# Altium PCB DST800_NMEA2k-CAN_Indicator.PcbDoc
Units mm, origin at the board's own origin, x right, y up, seen from the top; angles counter-clockwise.
Board outline 45 x 56 mm, 4 copper layers (Top Layer, Int1 (GND), Int2 (PWR), Bottom Layer), stack 1.369 mm thick; 41 components, 39 nets, 192 pads, 74 vias.
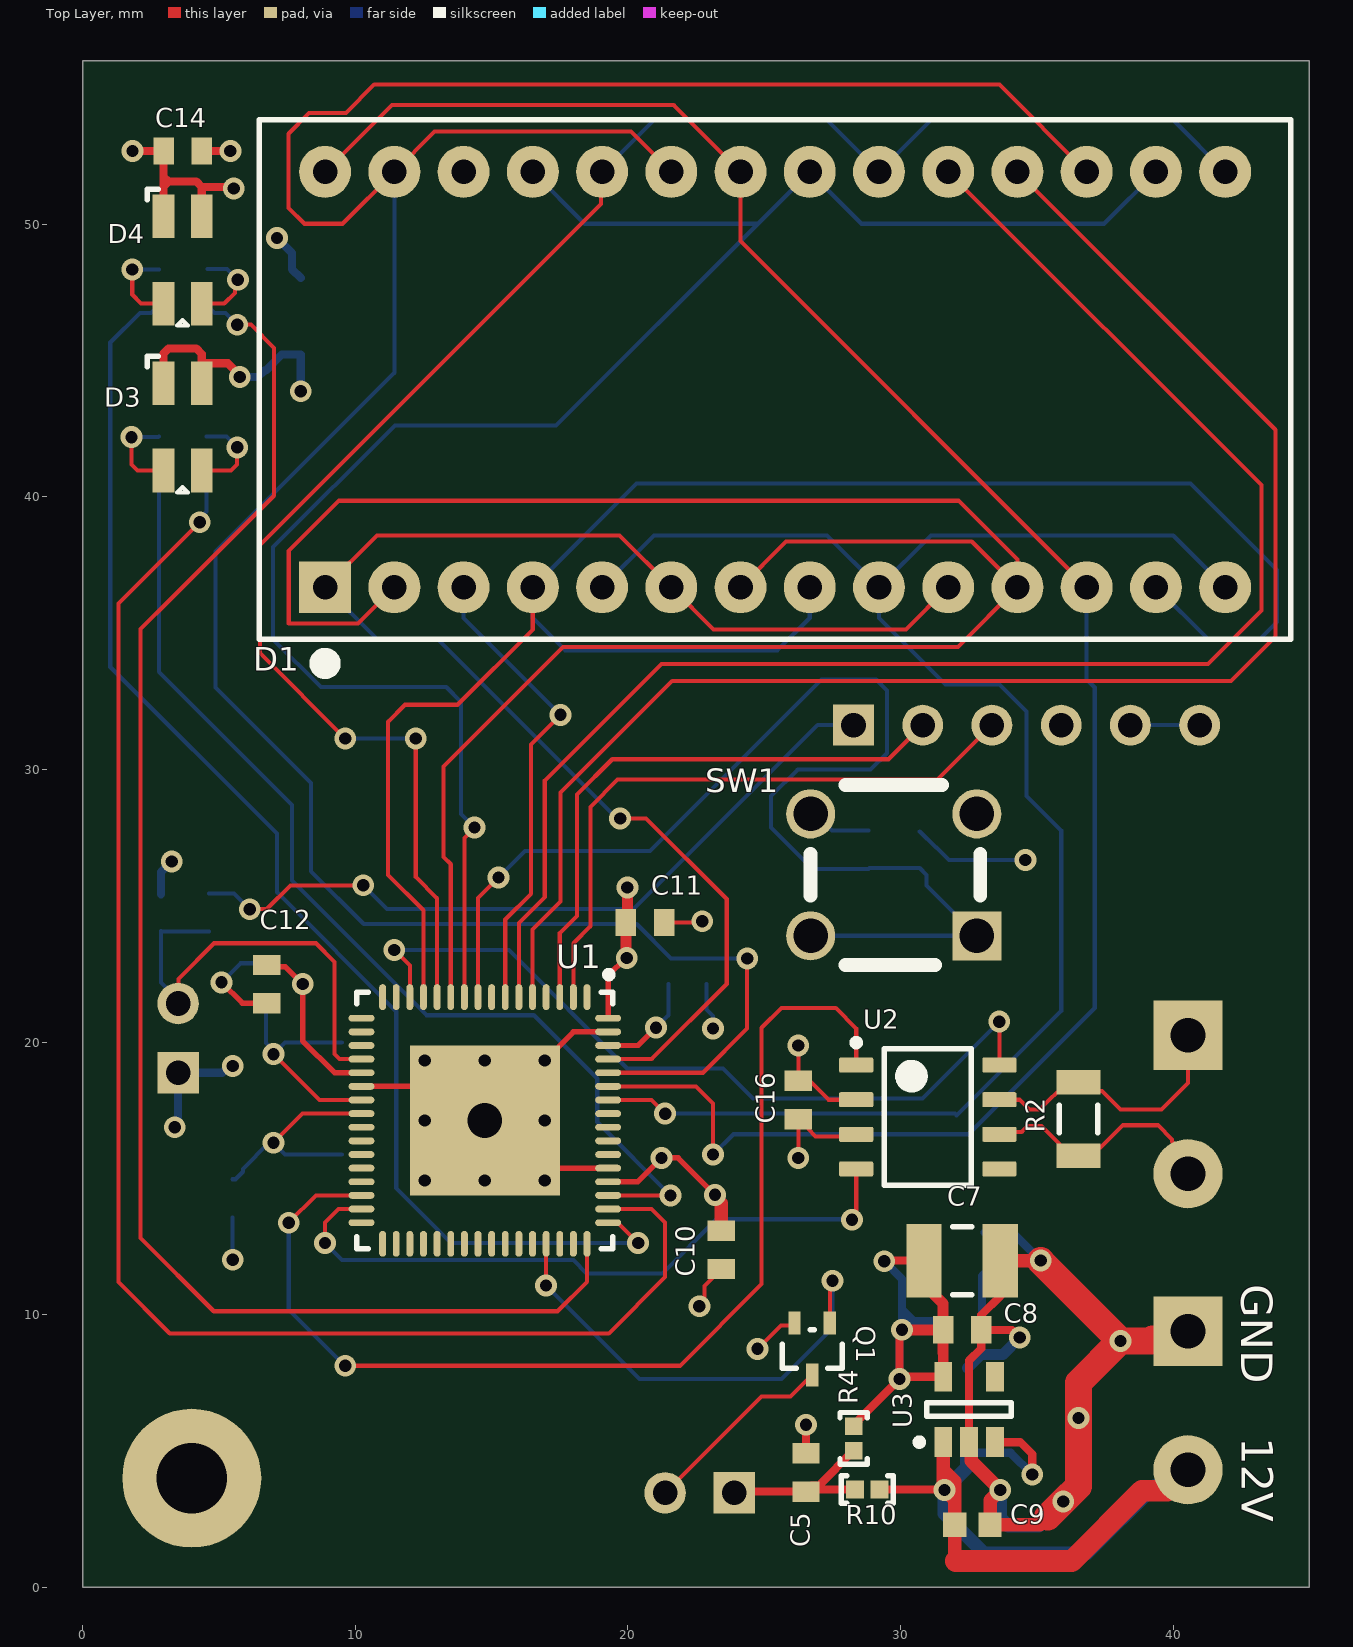
[diagram p0: Top Layer view]
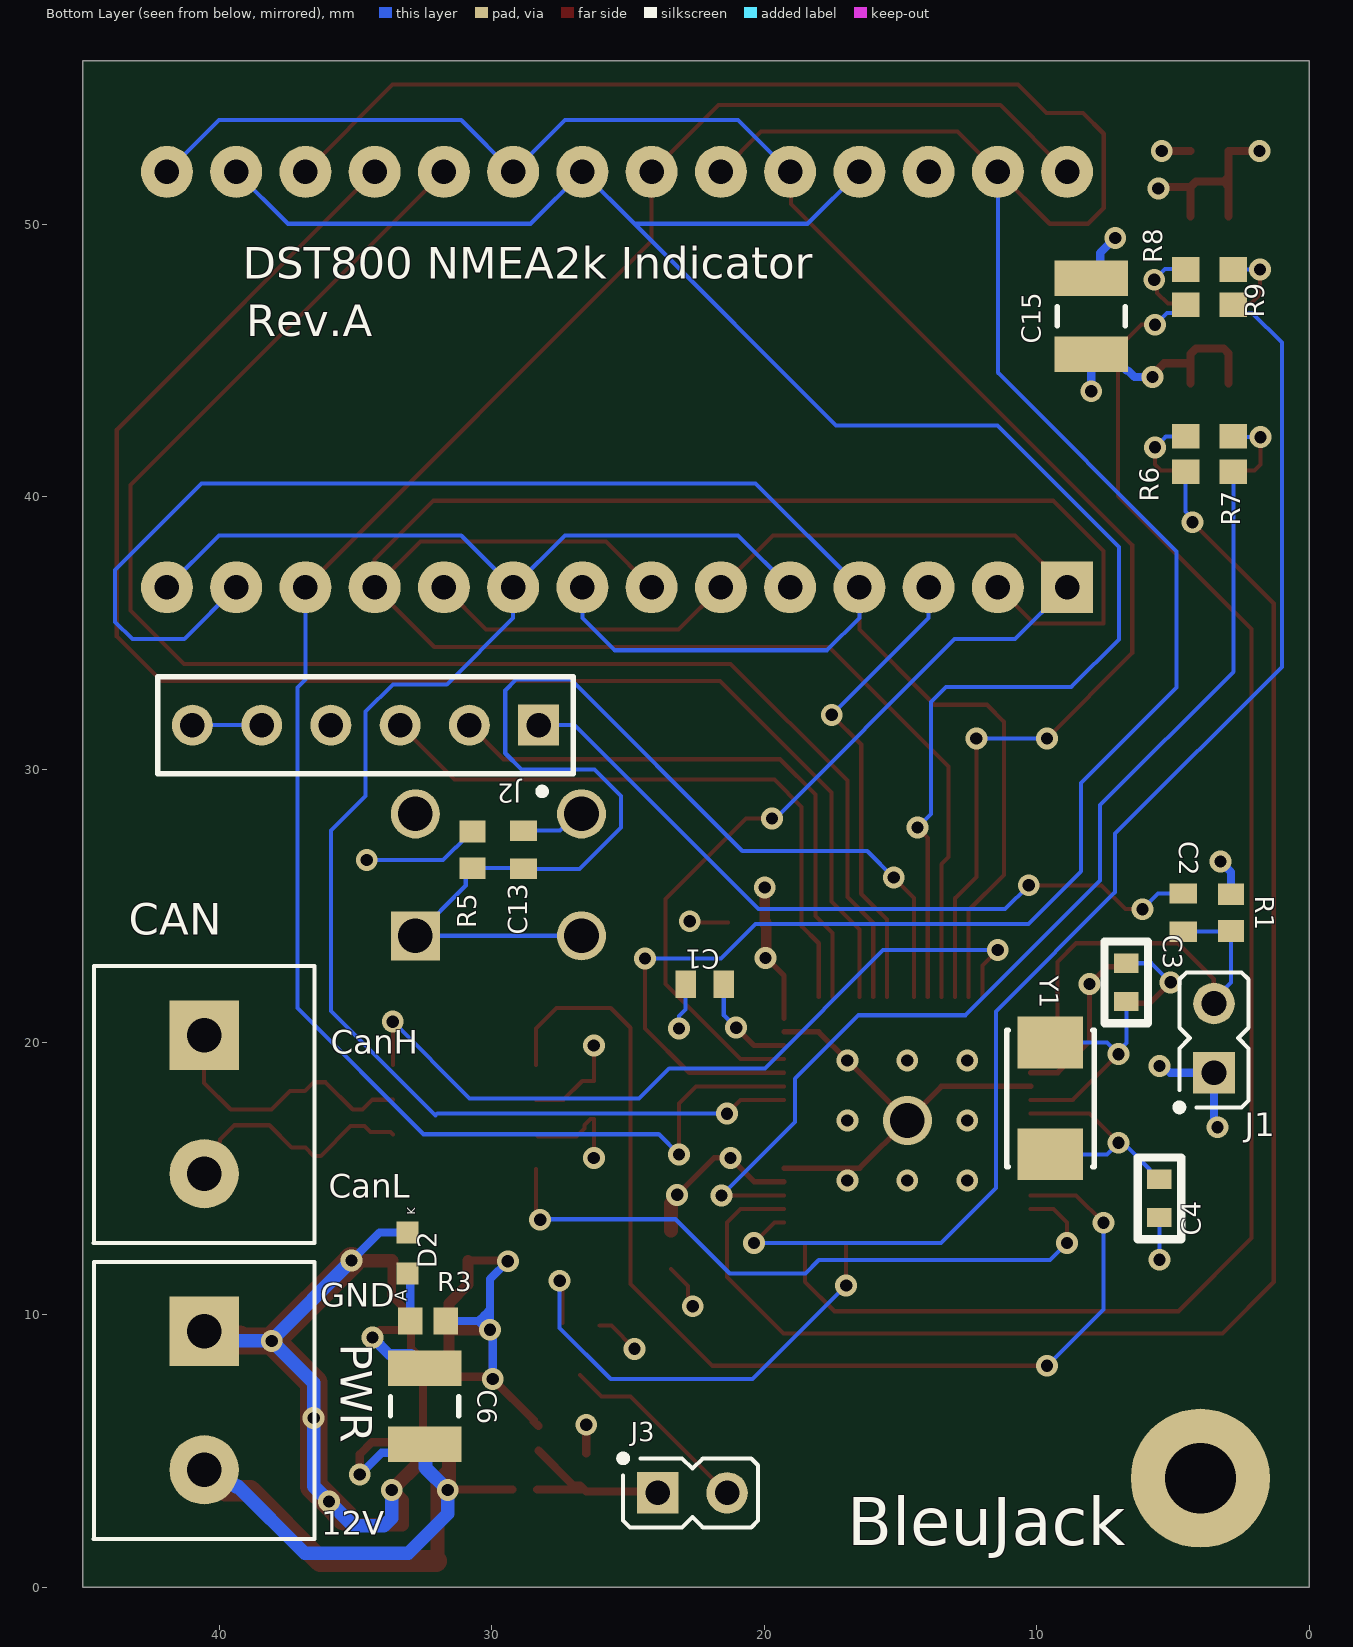
[diagram p1: Bottom Layer view, seen from below]
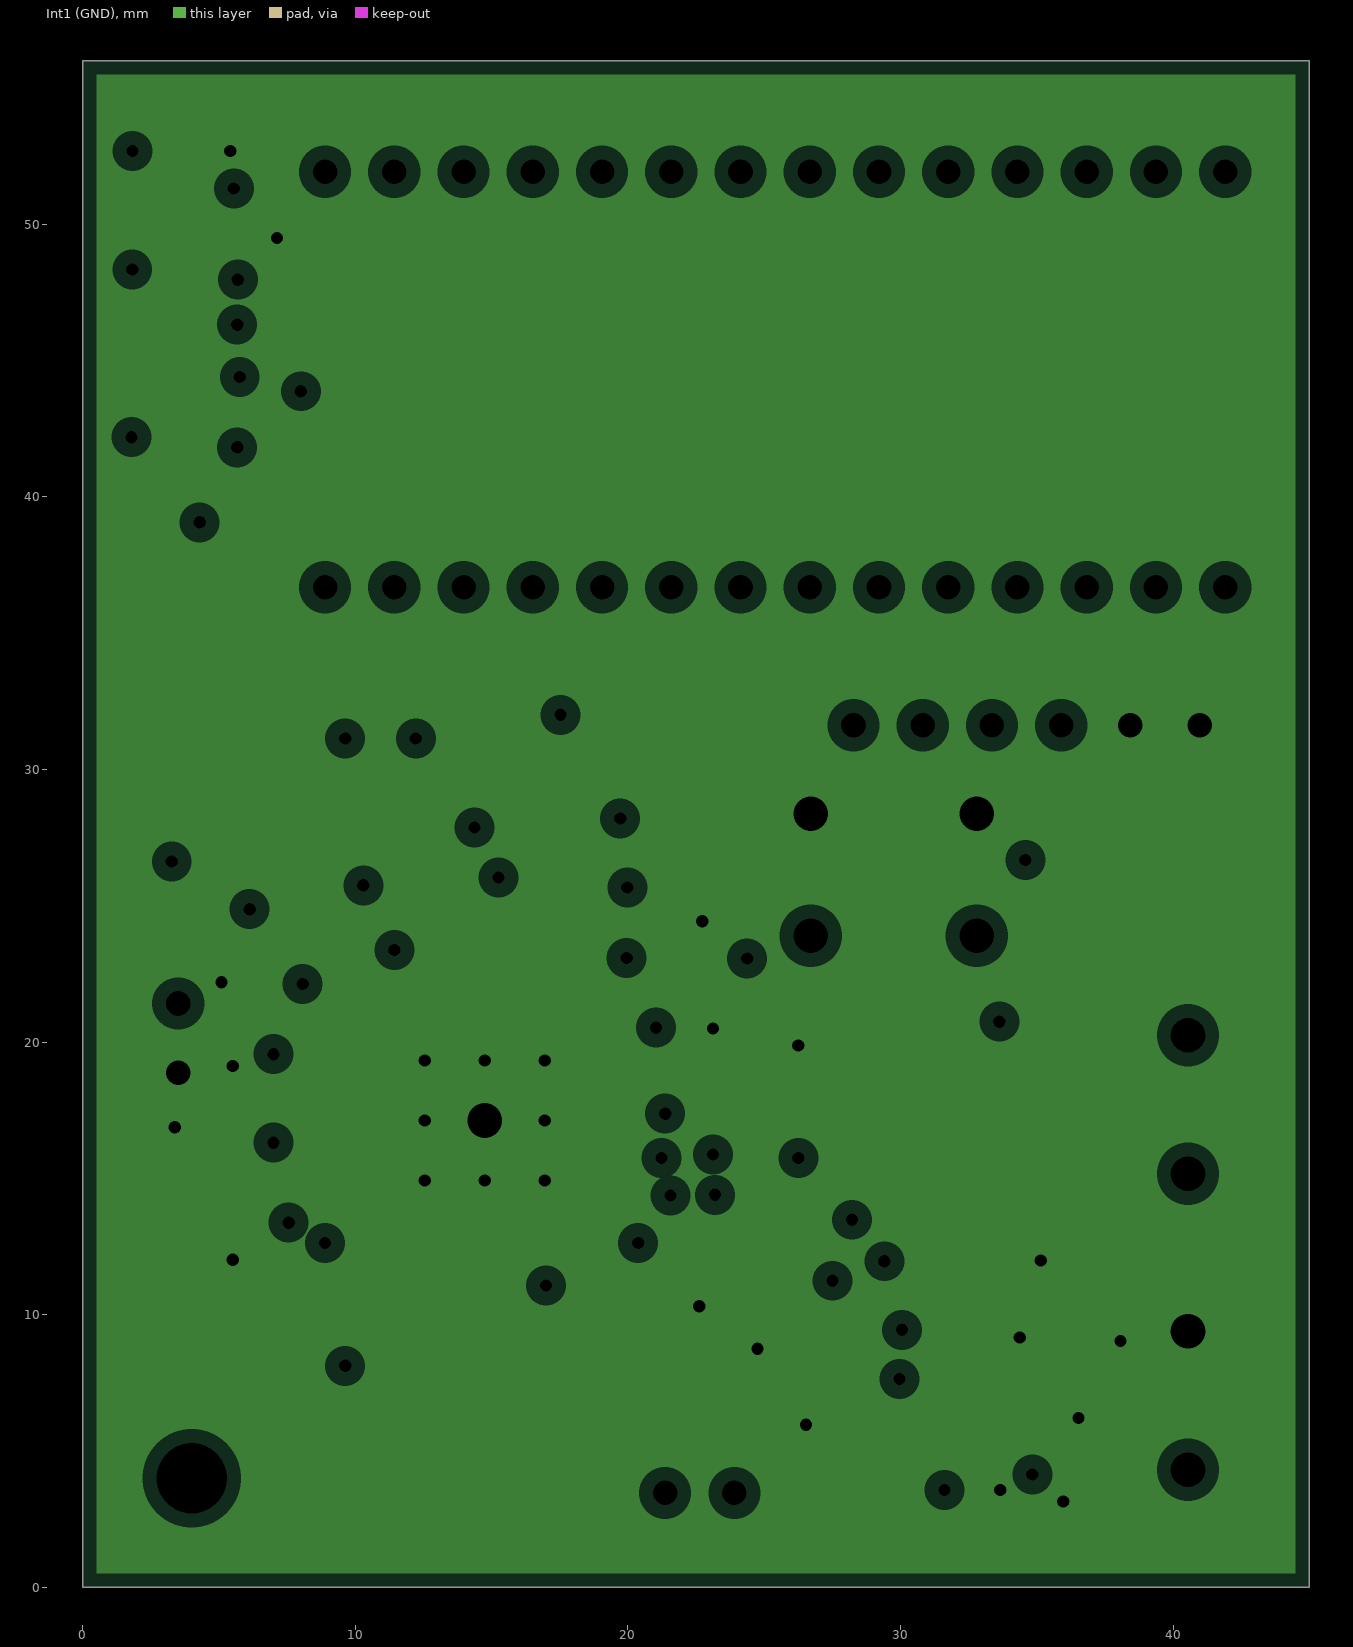
[diagram p2: Int1 (GND), clearances drawn from the general rule]
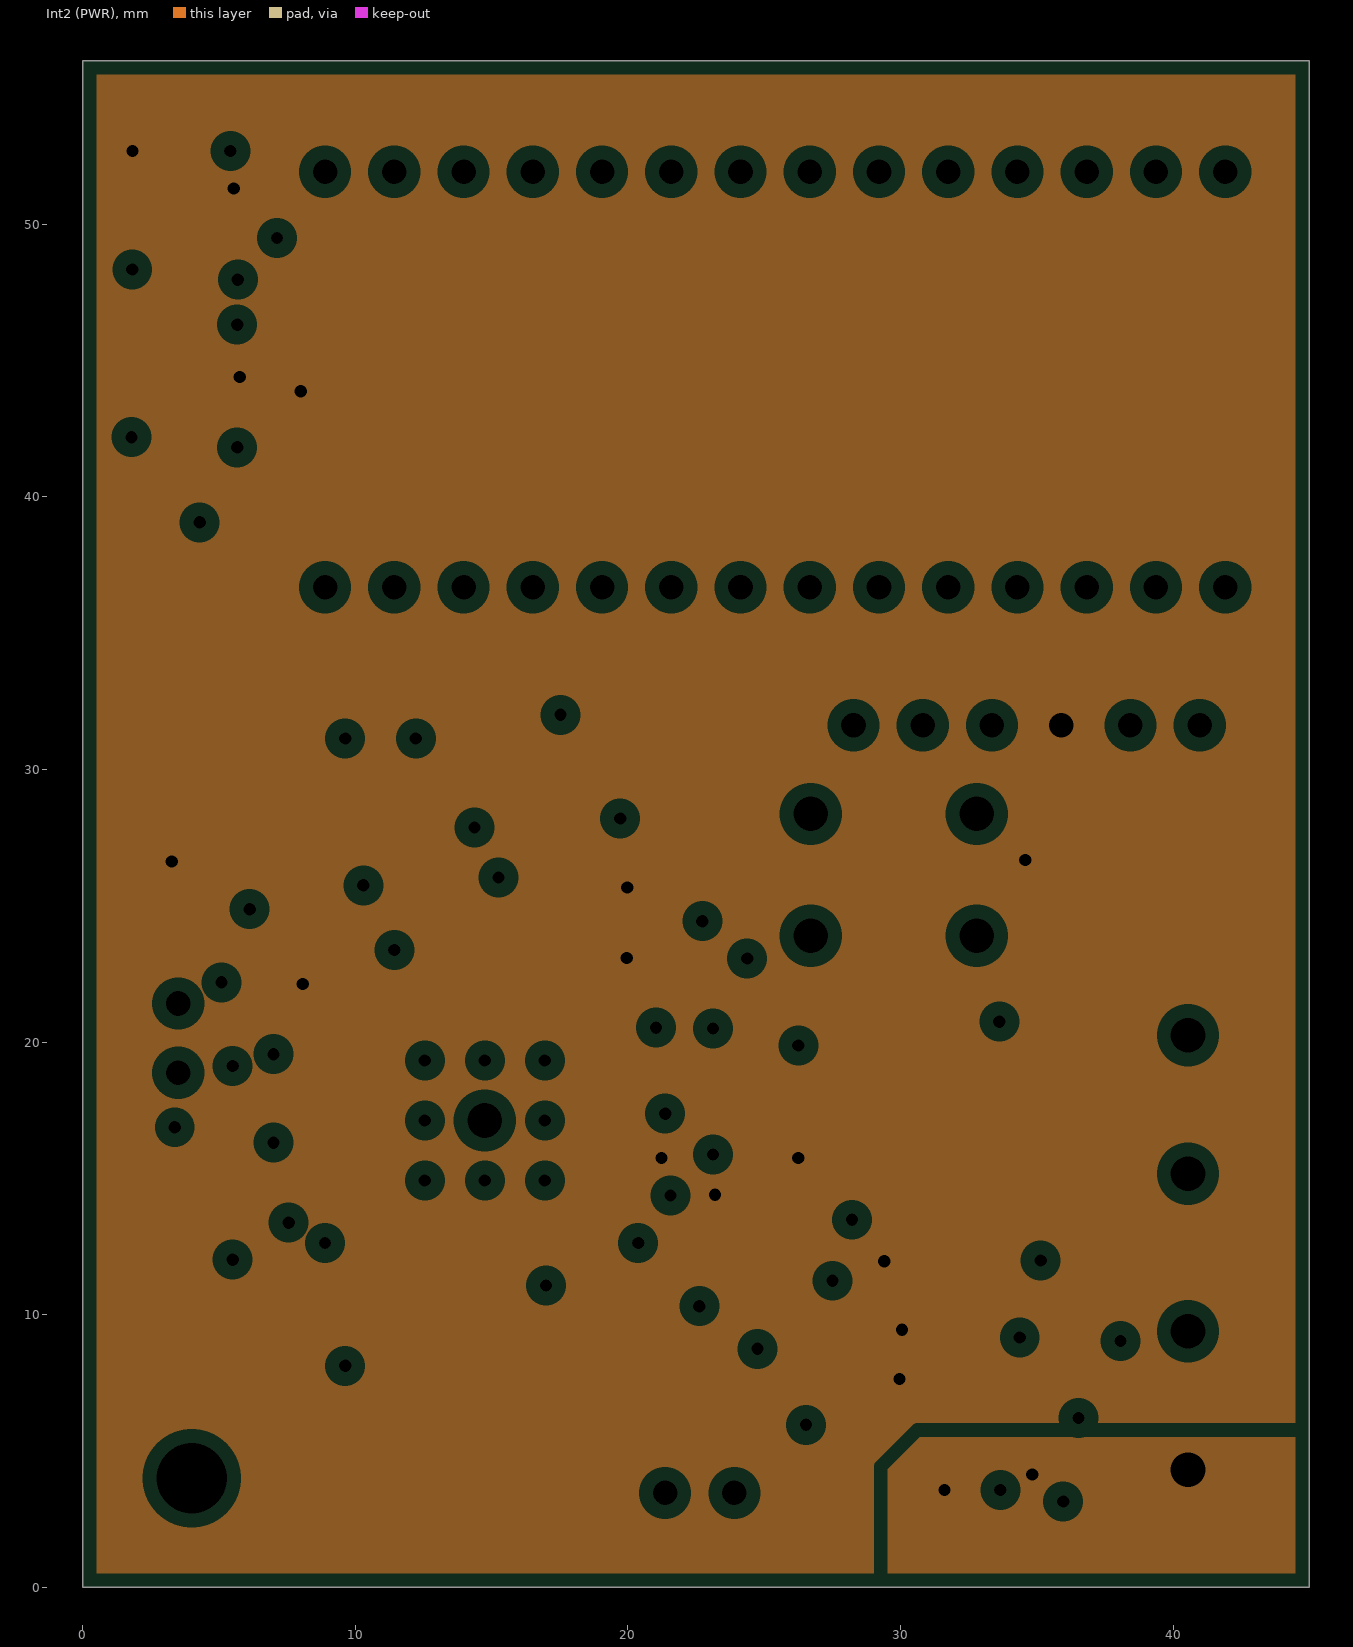
[diagram p3: Int2 (PWR), clearances drawn from the general rule]

## Layer stack, top to bottom
Top Solder: solder mask 0.0254, SM-001, Dk 4
Top Layer: signal copper 0.035
Dielectric 1: prepreg 0.1295, PP-017, Dk 4.3
Dielectric 2: prepreg 0.1295, PP-017, Dk 4.3
Int1 (GND): plane copper 0.035, net GND
Dielectric 3: core 0.7112, Core-039, Dk 4.8
Int2 (PWR): plane copper 0.035, net VCC
Dielectric 4: prepreg 0.1295, PP-017, Dk 4.3
Dielectric 5: prepreg 0.1295, PP-017, Dk 4.3
Bottom Layer: signal copper 0.035
Bottom Solder: solder mask 0.0254, SM-001, Dk 4

## Board outline
0,0 45,0 45,56 0,56

## Design rules (kind name [scope] priority, off if disabled: settings)
Clearance [All] p1: gap=0.203 ignorepadtopadclearanceinfootprint=FALSE
ComponentClearance [All] p1: gap=0 collisioncheckmode=3 verticalgap=0 showdistances=FALSE
DiffPairsRouting DiffPairsRouting_1 [All] p2: maxlimit=0.254 minlimit=0.254 mostfreqgap=0.254 toplayer_minwidth=0.381 toplayer_maxwidth=0.381 toplayer_prefwidth=0.381 bottomlayer_minwidth=0.381 bottomlayer_maxwidth=0.381 bottomlayer_prefwidth=0.381 maxuncoupledlength=12.7
FanoutControl Fanout_LCC [IsLCC] p1: bgadir=Out bgaviamode=Centered fanoutstyle=Auto fanoutdirection=Alternating viagrid=0.025 // Fanout_LCC (Default Rule)
FanoutControl Fanout_BGA [IsBGA] p2: bgadir=Out bgaviamode=Centered fanoutstyle=Auto fanoutdirection=Alternating viagrid=0.025 // Fanout_BGA (Default Rule)
FanoutControl Fanout_Default [All] p4: bgadir=Out bgaviamode=Centered fanoutstyle=Auto fanoutdirection=Alternating viagrid=0.025 // Fanout_Default (Default Rule)
FanoutControl Fanout_Small [(CompPinCount < 5)] p5: bgadir=Out bgaviamode=Centered fanoutstyle=Auto fanoutdirection=OutThenIn viagrid=0.025 // Fanout_Small (Default Rule)
FanoutControl Fanout_BGA_1 [IsBGA] p6: bgadir=Out bgaviamode=Centered fanoutstyle=Auto fanoutdirection=Alternating viagrid=0.025 // Fanout_BGA (Default Rule)
FanoutControl Fanout_LCC_1 [IsLCC] p7: bgadir=Out bgaviamode=Centered fanoutstyle=Auto fanoutdirection=Alternating viagrid=0.025 // Fanout_LCC (Default Rule)
FanoutControl Fanout_SOIC_1 [IsSOIC] p8: bgadir=Out bgaviamode=Centered fanoutstyle=Auto fanoutdirection=Alternating viagrid=0.025 // Fanout_SOIC (Default Rule)
FanoutControl Fanout_Small_1 [(CompPinCount < 5)] p9: bgadir=Out bgaviamode=Centered fanoutstyle=Auto fanoutdirection=OutThenIn viagrid=0.025 // Fanout_Small (Default Rule)
FanoutControl Fanout_Default_1 [All] p10: bgadir=Out bgaviamode=Centered fanoutstyle=Auto fanoutdirection=Alternating viagrid=0.025 // Fanout_Default (Default Rule)
Height Height_1 [All] p2: minheight=0 maxheight=25.4 prefheight=12.7
HoleSize [All] p1: absolutevalues=TRUE maxlimit=5 minlimit=0.45 maxpercent=80.000 minpercent=20.000
MinimumSolderMaskSliver [All] p1: minsoldermaskwidth=0
PasteMaskExpansion PasteMaskExpansion_1 [All] p2: expansion=0
PlaneClearance [All] p1: clearance=0.508
PlaneConnect [All] p1: pad.planeconnectstyle=Relief pad.reliefexpansion=0.5 pad.reliefentries=4 pad.reliefconductorwidth=0.3 pad.reliefairgap=0.25 via.planeconnectstyle=Direct via.reliefexpansion=0.508 via.reliefentries=4 via.reliefconductorwidth=0.254 via.reliefairgap=0.254
PolygonConnect [All] p1: connectstyle=Relief reliefconductorwidth=0.254 reliefentries=4 polygonreliefangle="90 Angle" airgapwidth=0.254
RoomDefinition DST800_NMEA2k-CAN_Indicator [InComponentClass('DST800_NMEA2k-CAN_Indicator')] p1: confinementstyle=ConfineIn formatcopy=TRUE lockcomponents=FALSE outline 0,0 45.085,0 45.085,55.753 0,55.753
RoutingCorners RoutingCorners_1 [All] p2: cornerstyle=45-Degree minsetback=2.54 maxsetback=2.54
RoutingLayers RoutingLayers_1 [All] p2: top layer_v5=TRUE bottom layer_v5=TRUE
RoutingPriority RoutingPriority_1 [All] p2: routingpriority=0
RoutingTopology RoutingTopology_1 [All] p2: topology=Shortest
RoutingVias [All] p1: holewidth=0.711 width=1.27 viastyle="Through Hole" minholewidth=0.711 minwidth=1.27 maxholewidth=0.711 maxwidth=1.27
RoutingVias RoutingVias_1 [All] p2: holewidth=0.711 width=1.27 viastyle="Through Hole" minholewidth=0.711 minwidth=1.27 maxholewidth=0.711 maxwidth=1.27
SilkToBoardRegionClearance SilkToBoardRegionClearance_1 [All] p2:
SilkToSilkClearance [All] p1: silktosilkclearance=0
SilkToSolderMaskClearance [IsPad] p1: minsilkscreentomaskgap=0 clearancetoexposedcopper=TRUE
SolderMaskExpansion [All] p1: expansion=0.102 istentingtop=FALSE
SolderMaskExpansion SolderMaskExpansion_1 [All] p2: expansion=0.102 istentingtop=FALSE
Width [All] p1: maxlimit=5 minlimit=0.15 preferedwidth=0.2 minimp=50.000000 maximp=50.000000 favimp=50.000000
19 further rules are at their usual default settings.

## Components (designator, comment, footprint, x,y, rotation, side; value= is the part's Value field where it differs from the comment)
C1 "CL10B104KB8NNNC" PCB-MHHQFTC5ILNRG4QI8DS6-1 22.185,22.125 r180 bottom value=0.1µF
C2 "CL10B104KB8NNNC" PCB-MHHQFTC5ILNRG4QI8DS6-1 4.625,24.75 r270 bottom value=0.1µF
C3 "C1608C0G1H150J080AA" PCB-69EC8BFNJHYEBNPBRRFX-1 6.716,22.191 r270 bottom value=15.0pF
C4 "C1608C0G1H150J080AA" PCB-69EC8BFNJHYEBNPBRRFX-1 5.5,14.267 r90 bottom value=15.0pF
C5 "CL10B104KB8NNNC" PCB-MHHQFTC5ILNRG4QI8DS6-1 26.53,4.21 r270 top value=0.1µF
C6 "C3225X7R1E106K250AC" PCB-J0JK5XR8QBNASKONCCG4-1 32.46,6.64 r270 bottom value=10.0µF
C7 "C3225X7R1E106K250AC" PCB-J0JK5XR8QBNASKONCCG4-1 32.262,11.983 r180 top value=10.0µF
C8 "CL10B104KB8NNNC" PCB-MHHQFTC5ILNRG4QI8DS6-1 32.262,9.443 r180 top value=0.1µF
C9 "06031C102MAT2A" CAPC1608X90X35LL15T15 32.637,2.293 r180 top value=1000pF
C10 "CL10B104KB8NNNC" PCB-MHHQFTC5ILNRG4QI8DS6-1 23.42,12.375 r90 top value=0.1µF
C11 "CL10B104KB8NNNC" PCB-MHHQFTC5ILNRG4QI8DS6-1 20.625,24.39 r180 top value=0.1µF
C12 "CL10B104KB8NNNC" PCB-MHHQFTC5ILNRG4QI8DS6-1 6.75,22.127 r90 top value=0.1µF
C13 "CL10B104KB8NNNC" PCB-MHHQFTC5ILNRG4QI8DS6-1 28.83,27.054 r270 bottom value=0.1µF
C14 "CL10B104KB8NNNC" PCB-mhhqftc5ilnrg4qi8ds6-1 3.666,52.692 r180 top value=0.1µF
C15 "C3225X7R1E106K250AC" PCB-j0jk5xr8qbnaskonccg4-1 8,46.625 r270 bottom value=10.0µF
C16 "CL10B104KB8NNNC" PCB-mhhqftc5ilnrg4qi8ds6-1 26.25,17.875 r270 top value=0.1µF
CAN "282834-2" PCB-0KDX5SNEYUDSMU18L6ZV-1 40.545,20.25 r270 bottom
D1 "LDT-A514RI" LDTA514RI 25.4,44.305 r0 top
D2 "LTST-C190KGKT" PCB-EAPFWHP0RNKSGUJF96H3-1 33.085,12.265 r90 bottom
D3 "APBD3224LSURKCGKC" DS_LED_3224 3.666,42.567 r90 top value="Red - Yellow-Green"
D4 "APBD3224LSURKCGKC" DS_LED_3224 3.666,48.692 r90 top value="Red - Yellow-Green"
J1 "5-146281-2" PCB-ANGFY19QUC8NC8NC7D0M-1 3.5,18.875 r90 bottom
J2 "961106-6404-AR" PCB-660833-1 34.625,31.625 r0 bottom
J3 "5-146281-2" PCB-angfy19quc8nc8nc7d0m-1 23.905,3.46 r180 bottom
PWR "282834-2" PCB-0KDX5SNEYUDSMU18L6ZV-1 40.545,9.39 r270 bottom
Q1 "BSS138W-7-F" SOT323-3N 26.755,8.745 r180 top value=BSS138W
R1 "CRG0603F10K" RESC1608X55X30NL15T15 2.875,24.75 r90 bottom value=10kΩ
R2 "CRCW1206120RJNEA" RESC3216X60X45LL10T20 36.53,17.175 r270 top value=120Ω
R3 "ERA-3YEB102V" RESC1608X55X30NL20T20 32.335,9.765 r180 bottom value=1kΩ
R4 "DNP" R_1005[0402] 28.28,5.46 r90 top value=0R
R5 "CRG0603F10K" RESC1608X55X30NL15T15 30.705,27.054 r90 bottom value=10kΩ
R6 "ERA-3YEB102V" RESC1608X55X30NL20T20 4.541,41.567 r270 bottom value=1kΩ
R7 "ERA-3YEB102V" RESC1608X55X30NL20T20 2.791,41.567 r270 bottom value=1kΩ
R8 "ERA-3YEB102V" RESC1608X55X30NL20T20 4.541,47.692 r270 bottom value=1kΩ
R9 "ERA-3YEB102V" RESC1608X55X30NL20T20 2.791,47.692 r270 bottom value=1kΩ
R10 "CRCW04020000Z0ED" R_1005[0402] 28.78,3.585 r0 top value=0R
SW1 "FSM102" PCB-8PS4WLA3PJ92CXV2YUVU-1 29.75,26.134 r180 top
U1 "AT90CAN32-16MU" Z64-1_M 14.75,17.125 r270 top
U2 "SN65HVD1050DR" D0008A_L 31,17.25 r0 top
U3 "MIC5205-5.0YM5-TR" SOT-23-5_N 32.516,6.522 r90 top
Y1 "ABM3-16.000MHZ-B2-T" ABRA-ABM3_V 9.5,17.933 r270 bottom

## Footprints (in the part's own frame and the unit in brackets; to place one, negate y for a bottom-side part, rotate by r counter-clockwise, add the part's x,y. Pads: shape width x height; smd on the part's side, far side on the other; paste and mask are expansions set on the pad)
ABRA-ABM3_V [mm] "SMD, 2-Leads, Body 5x3.2mm"
  rect 1.9x2.4 smd: 1(-2.05,0) 2(2.05,0)
  silkscreen extent -2.5,-1.6 2.5,1.6, body extent -2.5,-1.6 2.5,1.6, height 1.3
CAPC1608X90X35LL15T15 [mm] "CAPC1608X90X35LL15T15"
  rect 0.85x0.9 smd: 1(-0.65,0) 2(0.65,0)
  body extent -0.88,-0.48 0.88,0.48, height 0.9
D0008A_L [mm] "SOIC, 8-Leads, Body 5x4mm, Pitch 1.27mm, IPC High Density"
  rrect18% 1.25x0.55 smd: 1(-2.625,1.905) 2(-2.625,0.635) 3(-2.625,-0.635) 4(-2.625,-1.905) 5(2.625,-1.905) 6(2.625,-0.635) 7(2.625,0.635) 8(2.625,1.905)
  silkscreen extent -2.75,-2.5 1.6,2.85, body extent -3,-2.45 3,2.45, height 1.63
DS_LED_3224 [mm] "3.2x2.4mm"
  rect 1.6x0.8 smd mask+0.075: 1(1.6,0.7) 2(-1.6,0.7) 3(1.6,-0.7) 4(-1.6,-0.7)
  silkscreen extent -2.4,-0.2 2.6,1.3, body extent -1.6,-1.2 1.6,1.2, height 2.4
LDTA514RI [mm] "Lumex 2 digit 7 segment display"
  rect 1.905x1.905 hole 0.9: 1(-16.51,-7.62)
  round 1.905 hole 0.9: 2(-13.97,-7.62) 3(-11.43,-7.62) 4(-8.89,-7.62) 5(-6.35,-7.62) 6(-3.81,-7.62) 7(-1.27,-7.62) 8(1.27,-7.62) 9(3.81,-7.62) 10(6.35,-7.62) 11(8.89,-7.62) 12(11.43,-7.62) 13(13.97,-7.62) 14(16.51,-7.62) 15(16.51,7.62) 16(13.97,7.62) 17(11.43,7.62) 18(8.89,7.62) 19(6.35,7.62) 20(3.81,7.62) 21(1.27,7.62) 22(-1.27,7.62) 23(-3.81,7.62) 24(-6.35,7.62) 25(-8.89,7.62) 26(-11.43,7.62) 27(-13.97,7.62) 28(-16.51,7.62)
  silkscreen extent -18.92,-10.67 18.92,9.53, body extent -18.9,-9.5 18.9,9.5, height 12
PCB-0KDX5SNEYUDSMU18L6ZV-1 [mm]
  rect 2.54x2.54 hole 1.27: 1(0,0)
  round 2.54 hole 1.27: 2(5.08,0)
  silkscreen extent -2.54,-4.06 7.62,4.05, body extent -3.08,-4.04 7.65,4.06, height 10.01
PCB-8PS4WLA3PJ92CXV2YUVU-1 [mm]
  rect 1.8x1.8 hole 1.27: 1(-3.048,2.235)
  round 1.8 hole 1.27: 2(3.048,2.235) 3(-3.048,-2.235) 4(3.048,-2.235)
  silkscreen extent -3.18,-3.3 3.05,3.3, body extent -3.9,-3 3.9,2.99, height 5.97
PCB-69EC8BFNJHYEBNPBRRFX-1 [mm]
  rect 0.7x0.9 smd: 1(-0.7,0) 2(0.7,0)
  silkscreen extent -1.5,-0.8 1.5,0.8, body extent -0.8,-0.4 0.8,0.4, height 0.6
PCB-660833-1 [mm] "TE-5-534237-8"
  rect 1.5x1.5 hole 0.9: 1(-6.35,0)
  round 1.5 hole 0.9: 2(-3.81,0) 3(-1.27,0) 4(1.27,0) 5(3.81,0) 6(6.35,0)
  silkscreen extent -7.62,-1.78 7.62,2.55, body extent -6.98,-0.63 6.98,0.63, height 7.6
PCB-ANGFY19QUC8NC8NC7D0M-1 [mil]
  rect 60x60 hole 35.43: 1(0,0)
  round 60 hole 35.43: 2(100,0)
  silkscreen extent -55,-50 145,55, body extent -50,-50 150,50, height 374
PCB-angfy19quc8nc8nc7d0m-1 [mil]
  rect 60x60 hole 35.43: 1(0,0)
  round 60 hole 35.43: 2(100,0)
  silkscreen extent -55,-50 145,55, body extent -50,-50 150,50, height 374
PCB-EAPFWHP0RNKSGUJF96H3-1 [mm] "LTON_LTST-C190GKT"
  rect 0.8x0.8 smd: 1(-0.75,0) 2(0.75,0)
  body extent -0.8,-0.4 0.8,0.4, height 0.9
PCB-J0JK5XR8QBNASKONCCG4-1 [mm] "CAPC3225X279X50NL20T25"
  rect 1.3x2.7 smd: 1(-1.4,0) 2(1.4,0)
  silkscreen extent -0.35,-1.25 0.35,1.25, body extent -1.7,-1.35 1.7,1.35, height 2.79
PCB-j0jk5xr8qbnaskonccg4-1 [mm] "CAPC3225X279X50NL20T25"
  rect 1.3x2.7 smd: 1(-1.4,0) 2(1.4,0)
  silkscreen extent -0.35,-1.25 0.35,1.25, body extent -1.7,-1.35 1.7,1.35, height 2.79
PCB-MHHQFTC5ILNRG4QI8DS6-1 [mm] "CAPC1608X90X35NL15T15"
  rect 0.75x1 smd: 1(-0.7,0) 2(0.7,0)
  body extent -0.88,-0.48 0.87,0.48, height 0.9
PCB-mhhqftc5ilnrg4qi8ds6-1 [mm] "CAPC1608X90X35NL15T15"
  rect 0.75x1 smd: 1(-0.7,0) 2(0.7,0)
  body extent -0.88,-0.48 0.87,0.48, height 0.9
R_1005[0402] [mm] "Chip resistor; Body 1.1 x 0.5 mm (LxW typ)"
  rect 0.65x0.65 smd: 1(-0.45,0) 2(0.45,0)
  silkscreen extent -0.95,-0.5 0.95,0.5, body extent -0.5,-0.25 0.5,0.26, height 0.36
RESC1608X55X30NL15T15 [mm] "RESC1608X55X30NL15T15"
  rect 0.8x0.95 smd: 1(-0.675,0) 2(0.675,0)
  body extent -0.87,-0.48 0.87,0.48, height 0.55
RESC1608X55X30NL20T20 [mm] "RESC1608X55X30NL20T20"
  rect 0.9x1 smd: 1(-0.65,0) 2(0.65,0)
  body extent -0.9,-0.5 0.9,0.5, height 0.55
RESC3216X60X45LL10T20 [mm] "RESC3216X60X45LL10T20"
  rect 0.9x1.6 smd: 1(-1.35,0) 2(1.35,0)
  silkscreen extent -0.5,-0.7 0.5,0.7, body extent -1.65,-0.85 1.65,0.85, height 0.6
SOT323-3N [mm]
  rect 0.45x0.85 smd: 1(-0.653,-0.946) 2(0.647,-0.946) 3(-0.003,0.954)
  silkscreen extent -1.1,-0.7 1.1,0.7, body extent -1.1,-1.12 1.1,1.12, height 1.1
SOT-23-5_N [mm]
  rect 1.1x0.65 smd: 1(-1.2,0.95) 2(-1.2,0) 3(-1.2,-0.95) 4(1.2,-0.95) 5(1.2,0.95)
  silkscreen extent -1.32,-1.55 0.25,1.95, body extent -1.4,-1.45 1.4,1.45, height 1.45
Z64-1_M [mm] "QFN, 64-Leads, Body 9x9mm, Pitch 0.5mm, Thermal Pad 5.5x5.5mm, IPC Low Density"
  oval 0.95x0.25 smd: 1(-4.525,3.75) 2(-4.525,3.25) 3(-4.525,2.75) 4(-4.525,2.25) 5(-4.525,1.75) 6(-4.525,1.25) 7(-4.525,0.75) 8(-4.525,0.25) 9(-4.525,-0.25) 10(-4.525,-0.75) 11(-4.525,-1.25) 12(-4.525,-1.75) 13(-4.525,-2.25) 14(-4.525,-2.75) 15(-4.525,-3.25) 16(-4.525,-3.75) 33(4.525,-3.75) 34(4.525,-3.25) 35(4.525,-2.75) 36(4.525,-2.25) 37(4.525,-1.75) 38(4.525,-1.25) 39(4.525,-0.75) 40(4.525,-0.25) 41(4.525,0.25) 42(4.525,0.75) 43(4.525,1.25) 44(4.525,1.75) 45(4.525,2.25) 46(4.525,2.75) 47(4.525,3.25) 48(4.525,3.75)
  oval 0.25x0.95 smd: 17(-3.75,-4.525) 18(-3.25,-4.525) 19(-2.75,-4.525) 20(-2.25,-4.525) 21(-1.75,-4.525) 22(-1.25,-4.525) 23(-0.75,-4.525) 24(-0.25,-4.525) 25(0.25,-4.525) 26(0.75,-4.525) 27(1.25,-4.525) 28(1.75,-4.525) 29(2.25,-4.525) 30(2.75,-4.525) 31(3.25,-4.525) 32(3.75,-4.525) 49(3.75,4.525) 50(3.25,4.525) 51(2.75,4.525) 52(2.25,4.525) 53(1.75,4.525) 54(1.25,4.525) 55(0.75,4.525) 56(0.25,4.525) 57(-0.25,4.525) 58(-0.75,4.525) 59(-1.25,4.525) 60(-1.75,4.525) 61(-2.25,4.525) 62(-2.75,4.525) 63(-3.25,4.525) 64(-3.75,4.525)
  rect 5.5x5.5 smd: 65(0,0)
  silkscreen extent -5.47,-4.7 4.7,4.7, body extent -4.55,-4.55 4.55,4.55, height 1

## Part data
C1 C2 C5 C8 C10 C11 C12 C13 C14 C16: library part CMP-1af8d38ac64bc53f-5, "CAP CER 0.1uF 50V X7R 0603", Manufacturer="Samsung Electro-Mechanics", Supplier Part Number 1=1276-1000-1-ND, ManufacturerPartNumber=CL10B104KB8NNNC, Mounting Type=SMT, OctopartID=1af8d38ac64bc53f, Octopart URL=https://octopart.com/cl10b104kb8nnnc-samsung-7928277, Supplier 1=Digi-Key, Type=X7R
C3 C4: library part CMP-57259fa49f8088e2-2, "CAP CER 15pF ±5% 50V C0G/NP0 0603 [1608]", Manufacturer=TDK, Supplier Part Number 1=445-1271-1-ND, ManufacturerPartNumber=C1608C0G1H150J080AA, Mounting Type=SMT, OctopartID=57259fa49f8088e2, Octopart URL=https://octopart.com/c1608c0g1h150j080aa-tdk-25947587, Supplier 1=Digi-Key, Type=C0G/NP0
C6 C7 C15: library part CMP-2bdce35de069f41b-1, "CAP CER 10uF ±10% 25V X7R 1210", Case/Package=1210, Manufacturer=TDK, Supplier Part Number 1=445-3942-1-ND, ManufacturerPartNumber=C3225X7R1E106K250AC, Mounting Type=SMT, OctopartID=2bdce35de069f41b, Octopart URL=http://octopart.com/c3225x7r1e106k250ac-tdk-25947859, Supplier 1=Digi-Key, Type=X7R
C9: library part CMP-126202-2, "CAP CER 1000pF ±20% 100V X7R 0603", Case/Package=0603, Manufacturer=AVX, Supplier Part Number 1=478-3699-1-ND, Tolerance=±20%, ManufacturerPartNumber=06031C102MAT2A, Mounting Type=SMT, OctopartID=2b04e20cf2f8f4c3, Octopart URL=https://octopart.com/06031c102mat2a-avx+interconnect+%2F+elco-195738, Supplier 1=Digi-Key, Type=X7R
CAN PWR: library part CMP-369bfdc835bbe95c-32, "CONN Terminal Block; 16-30 AWG 0.197 in", Manufacturer="TE Connectivity", Supplier Part Number 1=A98333-ND, ManufacturerPartNumber=282834-2, Mounting Type=TH, Octopart URL=https://octopart.com/282836-2-te+connectivity-39396934, Supplier 1=Digi-Key
D1: library part CMP-6dbba4b18441b27c-1, "Display 3-digit 7-Seg 0.56 in", Case/Package=DIP, Manufacturer=Lumex, Supplier Part Number 1=67-1423-ND, ManufacturerPartNumber=LDT-A514RI, Mounting Type=TH, OctopartID=6dbba4b18441b27c, Octopart URL=http://octopart.com/ldt-a514ri-lumex-52380, Supplier 1=Digi-Key
D2: library part CMP-e1642866a00b3ea3-3, "LED 0603 green", Case/Package=0603, Manufacturer=Lite-On, Supplier Part Number 1=160-1435-1-ND, ManufacturerPartNumber=LTST-C190KGKT, Mounting Type=SMT, OctopartID=e1642866a00b3ea3, Octopart URL=http://octopart.com/ltst-c190kgkt-lite-on-549897, Supplier 1=Digi-Key
D3 D4: library part D_LED_RED_Y-GREEN_3224, "LED Red and Yellow-Green", Manufacturer=Kingbright, Supplier Part Number 1=754-1962-1-ND, Manufacturer_PN=APBD3224LSURKCGKC, RoHS=Yes, Supplier 1=Digi-Key, Technology=SMT
J1 J3: library part CMP-39c9f206a0b6e60e-14, "CONN HEADER VERT 2POS Single 0.1in pitch", Manufacturer="TE Connectivity", Supplier Part Number 1=A121481-ND, ManufacturerPartNumber=5-146281-2, Mounting Type=TH, OctopartID=39c9f206a0b6e60e, Supplier 1=Digi-Key
J2: library part CMP-660833-2, "CONN HEADER VERT 6POS Single 0.1in pitch", Manufacturer=3M, Supplier Part Number 1=3M9457-06-ND, ManufacturerPartNumber=961106-6404-AR, Mounting Type=TH, OctopartID=f2bb3b6a6b3d2d7c, Octopart URL=https://octopart.com/961106-6404-ar-3m-14400736, Supplier 1=Digi-Key
Q1: library part Q_BSS138W, "NMOS 200mA", Manufacturer="Diodes inc", Supplier Part Number 1=BSS138W-FDICT-ND, Manufacturer_PN=BSS138W-7-F, RoHS=Yes, Supplier 1=Digi-Key, Technology=SMT
R1 R5: library part CMP-584891b72cc4878f-2, "RES 10K 1% 0.1W 0603", Case/Package=0603, Manufacturer="TE Connectivity", Power Rating="0.1 W", Supplier Part Number 1=A106048CT-ND, ManufacturerPartNumber=CRG0603F10K, Mounting Type=SMT, Octopart URL=http://octopart.com/crg0603f10k-te+connectivity-16077290, OctopartID=584891b72cc4878f, Supplier 1=Digi-Key
R2: library part CMP-1858100-4, "RES Thick Film 120ohm 5% 1/4W 1206", Case/Package=1206[3216], Manufacturer=Vishay, Power Rating="0.25 W", Supplier Part Number 1=541-120ECT-ND, Tolerance=±5%, ManufacturerPartNumber=CRCW1206120RJNEA, Mounting Type=SMT, Octopart URL=https://octopart.com/crcw1206120rjnea-vishay+dale-39437323, OctopartID=57d69c85b6bb8811, Supplier 1=Digi-Key, Type=Thick
R3 R6 R7 R8 R9: library part CMP-3717598-2, "RES Metal Film 1Kohm 0.1%  0603", Manufacturer=Panasonic, Power Rating="0.063 W", Supplier Part Number 1=P1.0KYCT-ND, Tolerance=±0.1%, ManufacturerPartNumber=ERA-3YEB102V, Mounting Type=SMT, Octopart URL=https://octopart.com/era-3yeb102v-panasonic-55477313, OctopartID=4ba281e6ea859465, Supplier 1=Digi-Key, Type=Metal
R4: library part R_0R_0,0625W_0402, "Chip Resistor", Manufacturer=Vishay-Dale, Manufacturer_PN=CRCW04020000Z0ED, Power=1/16W, Supplier Part Number 1=541-0.0JCT-ND, Tolerance=jumper, Working Voltage=50V, RoHS=Yes, Supplier 1=Digi-Key, Technology=SMT
R10: library part R_0R_0,0625W_0402, "Chip Resistor", Manufacturer=Vishay-Dale, Power=1/16W, Supplier Part Number 1=541-0.0JCT-ND, Tolerance=jumper, Working Voltage=50V, Manufacturer_PN=CRCW04020000Z0ED, RoHS=Yes, Supplier 1=Digi-Key, Technology=SMT
SW1: library part CMP-43e488b0e8c29c23-11, "PUSHBUTTON Momentary Tactile SPST Thru-Hole", Manufacturer="TE Connectivity", Supplier Part Number 1=450-1128-ND, ManufacturerPartNumber=FSM102, Mounting Type=TH, OctopartID=43e488b0e8c29c23, Supplier 1=Digi-Key
U1: library part CMP-0096-00069-2, "8-bit AVR Microcontroller, 32KB Flash and CAN Controller, 53 GPIO pins, Industrial Grade (-40° to +85°C), 64-pin VQFN, Green", Code_JEDEC=MO-220VMMD-3, ComponentLink1Description="Manufacturer URL", ComponentLink1URL=http://www.atmel.com/, ComponentLink2Description="AT90CAN32/64/128 Datasheet", ComponentLink2URL=http://www.atmel.com/dyn/resources/prod_documents/doc7679.pdf, ComponentLink3Description="AT90CAN32/64/128 Summary", ComponentLink3URL=http://www.atmel.com/dyn/resources/prod_documents/7679S.pdf, DatasheetVersion="revH, Aug-2008", PackageDescription="64-Pin Quad Flat No-Lead, 9 x 9 mm Body, 0.5 mm Pitch, 5.4 x 5.4 mm Exposed Pad", PackageReference=Z64-1, PackageVersion=2008, RevisionNote="URLs added"
U2: library part CMP-0315-00053-2, "High-Speed EMC Optimized CAN Transceiver, 70 mA, 5 V, -40 to 125 degC, 8-pin SOIC (D), Green (RoHS & no Sb/Br)", Bus Fault Voltage(V)="-4 to 16", Drivers Per Package=1, Manufacturer="Texas Instruments", Rating=Catalog, Supply Voltage(s)(V)=5, Code_JEDEC=MS-012AA, ComponentLink1Description=Datasheet, ComponentLink1URL=http://www.ti.com/general/docs/lit/getliterature.tsp?genericPartNumber=SN65HVD1050&fileType=pdf, DatasheetVersion=SLLS632B, Eco-Plan="Green (RoHS & no Sb/Br)", ICC(Max)(mA)=70, Isolated=No, Mounting Technology="Surface Mount", PackageDescription="8-Pin Plastic Small Outline Integrated Circuit, 4.9 x 3.9 mm, Pitch 1.27 mm Pitch", PackageReference=D0008A, PackageVersion="revM, Jun-2011", PartNumber=SN65HVD1050DR, Receivers Per Package=1, SubFamily=CAN, Transient Pulse Protection(V)="-200 to 200"
U3: library part CMP-6255a8a416e5bd92-5, "IC Regulator LDO 5 V Fixed Output 150 mA SOT-23-5", Manufacturer=Microchip, Supplier Part Number 1=576-1261-1-ND, ManufacturerPartNumber=MIC5205-5.0YM5-TR, Mounting Type=SMT, Octopart URL=https://octopart.com/mic5205-5.0ym5-tr-microchip-66802134, Supplier 1=Digi-Key
Y1: library part CMP-2000-05729-1, "Ceramic Crystal, 16 MHz, 2-Pin SMD", Case Height=1.3mm, Case Length=5mm, Case Width=3.2mm, Frequency=16MHz, Manufacturer=ABRACON, Operating Temperature Range=-20Cto+70C, Package / Case=5mmx3.2mm, Package Description="2-Pin Surface Mount Device, Body 5 x 3.2 mm", Package Reference=ABM3, Brand=ABRACON, Datasheet URL=http://www.abracon.com/Resonators/abm3.pdf, Datasheet Version=09/2013, Dimensions=3.2mmWx5mmLx1.3mmH, Factory Pack Quantity=1000, ManufacturerPartNumber=ABM3-16.000MHZ-B2-T, Manufacturer URL=http://www.abracon.com/, Mounting Style=SMD/SMT, Mounting Technology=SurfaceMount, Packaging=Reel, Product Category=Crystals, RoHS=Details, Series=ABM3, Termination Style=SMD/SMT, Type=MiniatureCeramicCrystal

## Free pads (board coordinates)
  round 5.1 hole 2.6: 0(4,4)

## Via types
v1: diameter 0.8, hole 0.45, Top Layer to Bottom Layer, 64 vias
v2: diameter 0.8, hole 0.45, Top Layer to Bottom Layer, tented both sides, 9 vias
v3: diameter 1.8, hole 1.27, Top Layer to Bottom Layer, 1 vias

## Nets (pads, with @x,y where several pads share a name; then routed paths per layer and width w, separated by ;. In a path a pad name is that pad's centre, name@x,y a point inside that pad or via, vN(x,y) a via of type N, cw(c..) or ccw(c..) an arc to the next point about the centre after c; other vN are vias at no path point)
ANODE1: D1.18 U1.5 | length 57.5
  Top Layer w0.15: U1.5 16.5,24.135 17.526,25.161 17.526,29.151 21.625,33.25 42.117,33.25 43.752,34.885 43.752,42.464 D1.18
ANODE2: D1.19 U1.6 | length 58.1
  Top Layer w0.15: U1.6 16,24.365 16.95,25.315 16.95,29.59 21.235,33.875 41.285,33.875 43.244,35.833 43.244,40.432 D1.19
ANODE3: D1.3 U1.7 | length 17.3
  Top Layer w0.15: U1.7 15.5,24.5 16.44,25.44 16.44,30.918 v1(17.526,32.004)
  Bottom Layer w0.15: D1.3 13.97,35.56 v1(17.526,32.004)
BUTTON: C13.2 R5.1 SW1.1 SW1.2 U1.9 | length 46
  Top Layer w0.15: U1.9 14.5,25.285 v1(15.25,26.035)
  Bottom Layer w0.15: v1(15.25,26.035) 16.221,27.006 20.807,27.006 27.096,33.295 29.11,33.295 29.5,32.905 29.5,30.595 28.905,30 26.231,30 25.255,29.024 25.255,27.87 26.771,26.354 C13.2 28.855,26.379 R5.1 30.95,26.134 30.95,25.747 SW1.1 SW1.2
BUZ: Q1.1 U1.45 | length 17.6
  Top Layer w0.15: v1(16.996,11.068) 17,11.072 U1.45 ; Q1.1 27.407,11.148 v1(27.505,11.245)
  Bottom Layer w0.15: v1(16.996,11.068) 20.423,7.64 25.63,7.64 27.505,9.515 v1(27.505,11.245)
CAN_S: U1.14 U2.8 | length 29.1
  Top Layer w0.15: v1(11.43,23.375) 12,22.805 U1.14 ; U2.8 v1(33.625,20.75)
  Bottom Layer w0.15: v1@11.5,23.375 15.638,23.375 19.975,19.038 23.486,19.038 24.591,17.933 30.808,17.933 v1(33.625,20.75)
CANH: CAN.1 R2.1 U2.7 | length 10.1
  Top Layer w0.15: U2.7 34.365,17.885 34.73,17.52 35.095,17.52 36.1,18.525 R2.1 36.855,18.2 37.394,18.2 38.074,17.52 39.57,17.52 40.545,18.495 CAN.1
CANL: CAN.2 R2.2 U2.6 | length 9.1
  Top Layer w0.15: U2.6 33.706,16.696 34.446,16.696 34.668,16.918 35.174,16.918 36.267,15.825 R2.2 36.83,16.125 37.334,16.125 38.159,16.95 39.44,16.95 39.966,16.424 39.966,16.355 40.545,15.776 CAN.2
DTR: C2.1 J2.1 | length 27.4
  Top Layer w0.15: v1(6.125,24.875) 6.75,24.875 7.625,25.75 v1(10.293,25.75)
  Bottom Layer w0.15: C2.1 5.55,25.45 v1(6.125,24.875) ; v1(10.293,25.75) 11.168,24.875 20.212,24.875 26.962,31.625 J2.1
GND: C1.1 C3.1 C4.1 C5.1 C6.1 C7.1 C8.1 C9.1 C10.1 C11.1 C12.1 C13.1 C14.1 C15.1 C16.1 D2.2 J1.1 J2.5 J2.6 PWR.1 Q1.2 SW1.3 SW1.4 U1.22 U1.53 U1.63 U1.65 U2.2 U3.2 | length 97.4
  Top Layer w0.15: C11.1 22.685,24.39 v2(22.73,24.435) ; v1(22.621,10.31) 22.803,10.492 22.803,11.058 C10.1 ; v1(24.755,8.745) 25.608,9.598 Q1.2@26.032,9.598 ; v1(26.25,19.875) C16.1 26.675,18.575 27.365,17.885 U2.2
  Top Layer w0.2: v2(5.091,22.191) 5.855,21.427 C12.1 ; U1.22 13.5,18.375 v3(14.75,17.125) ; U1.53 16.5,15.375 v3(14.75,17.125) ; U1.63 18,20.375 v1(16.95,19.325) v3(14.75,17.125)
  Top Layer w0.3: C14.1 v1(5.416,52.692) ; C5.1 v1(26.53,5.96) ; U3.2 32.516,8.317 32.962,8.763 C8.1 ; C7.1 33.662,10.688 32.962,9.988 C8.1 ; v1(34.374,9.16) 34.091,9.443 C8.1
  Top Layer w0.5: U3.2 32.591,5.247 32.591,4.636 v1(33.662,3.565) 33.287,3.19 C9.1 35.113,2.293 35.405,2.585 ; C7.1 v1(35.142,11.983)
  Top Layer w1: v1(35.142,11.983) 35.142,11.961 v1(38.066,9.037) ; 35.405,2.585 v2(35.967,3.147) 36.53,3.71 v2(36.53,6.21) 36.53,7.5 v1(38.066,9.037) ; PWR.1 40.25,9.095 39.248,9.095 39.189,9.037 v1(38.066,9.037)
  Bottom Layer w0.15: v2(5.091,22.191) 5.791,22.891 C3.1 ; v2(5.5,12.017) C4.1 ; C1.1 22.885,21.2 23.125,20.96 v2(23.125,20.5) ; SW1.4 26.875,28.37 27.49,27.754 C13.1 ; J2.5 J2.6
  Bottom Layer w0.3: v1(3.375,16.875) 3.5,17 J1.1 5.115,18.875 5.365,19.125 v1(5.5,19.125) ; v1(7.125,49.5) 7.676,48.949 7.676,48.349 C15.1 ; D2.2 34.11,13.015 v1(35.142,11.983)
  Bottom Layer w0.4: C6.1 32.96,8.54 33.754,8.54 v1(34.374,9.16)
  Bottom Layer w0.5: v1(33.662,3.565) 33.662,2.543 33.955,2.25 35.07,2.25 v2(35.967,3.147) 36.53,3.71 v2(36.53,6.21) 36.53,7.5 v1(38.066,9.037) ; v1(35.142,11.983) 38.066,9.059 v1(38.066,9.037) ; PWR.1 40.191,9.037 v1(38.066,9.037)
  other v1: 12.55,14.925 14.75,14.925 16.95,14.925 12.55,17.125 16.95,17.125 12.55,19.325 14.75,19.325
Led_R_1: R7.2 U1.51 | length 38.9
  Top Layer w0.15: U1.51 v1(21.565,14.375)
  Bottom Layer w0.15: R7.2 2.791,33.584 7.676,28.699 7.676,25.92 12.611,20.985 16.545,20.985 18.875,18.655 18.875,17.065 v1(21.565,14.375)
Led_R_2: R9.2 U1.49 | length 48.8
  Top Layer w0.15: U1.49 19.625,13.375 v1(20.375,12.625)
  Bottom Layer w0.15: R9.2 2.497,46.749 2.097,46.749 1.008,45.66 1.008,33.765 7.125,27.648 7.125,25.498 11.5,21.123 11.5,14.642 13.517,12.625 v1(20.375,12.625)
Led_V_1: R6.2 U1.50 | length 57.1
  Top Layer w0.15: v1(4.291,39.067) 1.308,36.085 1.308,11.192 3.192,9.308 19.298,9.308 21.365,11.375 21.365,13.379 20.868,13.875 U1.50
  Bottom Layer w0.15: v1(4.291,39.067) 4.291,39.216 4.541,39.466 R6.2
Led_V_2: R8.2 U1.48 | length 57.1
  Top Layer w0.15: v1(5.666,46.317) 6.166,46.317 7.015,45.468 7.015,40.042 3.219,36.246 2.125,35.152 2.125,12.806 4.806,10.125 17.419,10.125 18.5,11.206 U1.48
  Bottom Layer w0.15: R8.2 4.831,46.752 5.231,46.752 v1(5.666,46.317)
NetC1_2: C1.2 U1.62 | length 3.8
  Top Layer w0.2: U1.62 20.375,19.875 v2(21.03,20.53)
  Bottom Layer w0.15: v2(21.03,20.53) 21.485,20.985 C1.2
NetC2_2: C2.2 J1.2 R1.1 U1.20 | length 16.6
  Top Layer w0.15: J1.2 3.509,21.424 3.509,22.314 4.82,23.625 8.557,23.625 9.239,22.942 9.239,19.558 9.422,19.375 U1.20
  Bottom Layer w0.15: J1.2 3.5,21.566 2.875,22.191 R1.1 2.9,24.05 C2.2
NetC3_2: C3.2 U1.23 Y1.1 | length 8.6
  Top Layer w0.15: v2(7,19.558) 8.683,17.875 U1.23
  Bottom Layer w0.15: C3.2 6.716,19.971 7,19.687 v2(7,19.558) 7.426,19.983 Y1.1
NetC4_2: C4.2 U1.24 Y1.2 | length 8.5
  Top Layer w0.15: v2(7,16.308) 8.067,17.375 U1.24
  Bottom Layer w0.15: C4.2 5.6,14.967 5.875,15.242 5.875,15.342 6.84,16.308 v2(7,16.308) 7.426,15.883 Y1.2
NetC5_2: C5.2 J3.1 R4.1 R10.1 | length 6.7
  Top Layer w0.3: J3.1 23.955,3.51 C5.2 C5.2@26.605,3.585 ; R4.1 27.005,3.735 26.755,3.735 C5.2@26.605,3.585 ; R10.1 27.005,3.585 26.755,3.585 C5.2@26.605,3.585
NetD2_1: D2.1 R3.1 | length 1.8
  Bottom Layer w0.3: R3.1 32.985,11.415 D2.1
NetD3_2: D3.2 R7.1 | length 3.3
  Top Layer w0.15: v1(1.791,42.192) 1.791,41.192 2.016,40.967 D3.2
  Bottom Layer w0.15: v1(1.791,42.192) 2.766,42.192 R7.1
NetD3_4: D3.4 R6.1 | length 3.3
  Top Layer w0.15: D3.4 5.441,40.967 5.666,41.192 v1(5.666,41.817)
  Bottom Layer w0.15: R6.1 4.544,42.214 5.269,42.214 v1(5.666,41.817)
NetD4_2: D4.2 R9.1 | length 3.2
  Top Layer w0.15: v1(1.816,48.342) 1.816,47.417 2.141,47.092 D4.2
  Bottom Layer w0.15: v1(1.816,48.342) R9.1
NetD4_4: D4.4 R8.1 | length 3.2
  Top Layer w0.15: D4.4 5.191,47.092 5.585,47.487 5.585,47.862 v1(5.691,47.967)
  Bottom Layer w0.15: R8.1@4.569,48.364 5.294,48.364 v1(5.691,47.967)
NetJ3_2: J3.2 Q1.3 | length 7.2
  Top Layer w0.15: J3.2 24.905,7 25.967,7 Q1.3
RXCAN: U1.31 U2.4 | length 24.8
  Top Layer w0.15: v1(8.89,12.625) 8.89,13.379 9.386,13.875 U1.31 ; v1(28.22,13.482) 28.22,13.617 28.375,13.772 U2.4
  Bottom Layer w0.15: v1(8.89,12.625) 9.515,12 18,12 18.485,11.515 21.265,11.515 23.251,13.501 v1@28.22,13.501
RXI: J2.3 U1.2 | length 23.2
  Top Layer w0.15: U1.2 18,23.625 18.625,24.25 18.625,28.625 19.625,29.625 31.355,29.625 J2.3
SEGA: D1.16 D1.21 D1.25 U1.10 | length 71.1
  Top Layer w0.15: U1.10 14,27.485 14.375,27.86 v1(14.375,27.87)
  Bottom Layer w0.15: v1(14.375,27.87) 13.875,28.37 13.875,32.48 13.335,33.02 8.738,33.02 6.985,34.773 6.985,38.158 11.448,42.621 17.366,42.621 24.765,50.02 ; D1.25 18.415,50.02 24.765,50.02 ; D1.16 37.465,50.02 28.575,50.02 D1.21 24.765,50.02
SEGB: D1.15 D1.20 D1.24 U1.12 | length 66
  Top Layer w0.15: v1(9.627,31.14) 6.5,34.267 6.5,38.229 19.011,50.74 19.011,51.886 D1.24 ; v1@12.44,30.918 v1(12.217,31.14) 12.217,26.058 13,25.275 U1.12
  Bottom Layer w0.15: v1(9.627,31.14) v1(12.217,31.14) ; D1.24 20.955,53.83 27.305,53.83 D1.20 31.115,53.83 40.005,53.83 D1.15
SEGC: D1.4 D1.8 D1.13 U1.13 | length 69.9
  Top Layer w0.15: U1.13 12.5,24.836 11.201,26.134 11.201,31.75 11.826,32.375 13.75,32.375 16.51,35.135 D1.4
  Bottom Layer w0.15: D1.8 26.67,35.56 25.485,34.375 17.695,34.375 16.51,35.56 D1.4 20.32,40.495 40.64,40.495 43.815,37.32 43.815,35.415 43.18,34.78 41.275,34.78 D1.13
SEGD: D1.2 D1.7 D1.11 U1.11 | length 80.4
  Top Layer w0.15: D1.2 10.097,35.352 7.557,35.352 7.557,38.019 9.398,39.86 32.131,39.86 34.29,37.701 D1.11 ; U1.11 13.5,26.525 13.24,26.785 13.24,30.115 17.625,34.5 32.105,34.5 D1.11 ; D1.7 25.806,38.361 32.614,38.361 D1.11
SEGDP: D1.5 D1.9 D1.14 U1.58 | length 63.9
  Top Layer w0.15: U1.58 20.865,17.875 v1(21.365,17.375)
  Bottom Layer w0.15: D1.5 20.955,38.59 27.305,38.59 D1.9 ; v1(21.365,17.375) 31.996,17.375 32.061,17.311 35.895,21.145 35.895,27.754 34.625,29.024 34.625,32.125 33.625,33.125 31.645,33.125 29.21,35.56 D1.9 ; D1.14 40.005,38.59 31.115,38.59 D1.9
SEGE: D1.1 D1.6 D1.10 U1.61 | length 53.8
  Top Layer w0.15: D1.1 10.795,38.59 19.685,38.59 D1.6 23.14,35.135 30.2,35.135 D1.10 ; U1.61 20.873,19.375 23.625,22.127 23.625,25.25 20.669,28.206 v1(19.715,28.206)
  Bottom Layer w0.15: D1.1 10.795,34.78 13.019,34.78 19.593,28.206 v1(19.715,28.206)
SEGF: D1.17 D1.23 D1.27 U1.60 | length 105.9
  Top Layer w0.15: U1.60 22.75,18.875 24.375,20.5 v1(24.375,23.07) ; D1.23 20.117,53.398 12.903,53.398 D1.27 9.525,50.02 8.128,50.02 7.544,50.604 7.544,53.322 8.306,54.084 9.652,54.084 10.693,55.125 33.63,55.125 D1.17
  Bottom Layer w0.15: D1.27 11.43,44.555 4.875,38 4.875,33 8.375,29.5 8.375,26.265 10.309,24.331 20.324,24.331 21.585,23.07 v1(24.375,23.07)
SEGG: D1.12 D1.22 D1.28 U1.59 | length 75.5
  Top Layer w0.15: D1.28 11.34,54.375 21.68,54.375 D1.22 24.13,49.385 D1.12 ; U1.59 22.5,18.375 23.125,17.75 v1(23.125,15.875)
  Bottom Layer w0.15: v1(23.125,15.875) 23.868,16.618 32.493,16.618 37.125,21.25 37.125,33 36.83,33.295 D1.12
TXCAN: U1.30 U2.1 | length 40.5
  Top Layer w0.15: v1(7.557,13.375) 8.557,14.375 U1.30 ; v1(9.627,8.125) 21.905,8.125 24.905,11.125 24.905,20.525 25.63,21.25 27.625,21.25 28.375,20.5 U2.1
  Bottom Layer w0.15: v1(7.557,13.375) 7.557,10.195 v1(9.627,8.125)
TXO: J2.2 U1.3 | length 21.4
  Top Layer w0.15: U1.3 17.5,24 18.125,24.625 18.125,29.075 19.425,30.375 29.565,30.375 J2.2
VCC: C7.2 C8.2 C10.2 C11.2 C12.2 C14.2 C15.2 C16.2 D3.1 D3.3 D4.1 D4.3 J2.4 R1.2 R3.2 R4.2 R5.2 U1.21 U1.52 U1.64 U2.3 U3.5 | length 65.1
  Top Layer w0.15: v1(26.25,15.75) C16.2 26.375,17.175 26.6,16.95 26.6,16.825 26.884,16.541 28.301,16.541 U2.3
  Top Layer w0.2: C12.2 6.815,22.761 7.433,22.761 v1(8.067,22.127) 8.067,20.047 9.239,18.875 U1.21 ; U1.52 20.36,14.875 v1(21.235,15.75) 21.84,15.75 v1(23.195,14.395) ; U1.64 19.275,22.435 v1@19.925,23.085
  Top Layer w0.3: v1(1.827,52.688) 2.962,52.688 C14.2 2.966,51.743 ; D3.1 2.966,45.267 3.141,45.442 4.166,45.442 4.366,45.242 D3.3@4.366,44.901 ; D4.1 2.966,51.392 ; D3.3 D3.3@4.366,44.901 ; D4.3 4.366,51.367 ; v1(5.541,51.317) 5.491,51.367 4.366,51.367 ; v1(5.76,44.399) 5.76,44.475 5.334,44.901 D3.3@4.366,44.901 ; R4.2 28.455,6.085 28.455,6.134 v1(29.96,7.64) ; v1(29.405,11.96) 29.428,11.983 C7.2 ; v1(30.056,9.443) 30.056,9.308 29.96,9.212 v1(29.96,7.64) ; U3.5 30.043,7.722 v1(29.96,7.64) ; 2.966,51.392 2.966,51.743 ; 2.966,51.392 3.141,51.567 ; 2.966,51.743 3.141,51.567 ; 3.141,51.567 4.166,51.567 4.366,51.367
  Top Layer w0.4: v1@19.925,23.085 C11.2 ; C11.2@19.98,24.335 v1(19.98,25.67) ; v1(30.056,9.443) C8.2 ; C7.2 30.862,11.113 31.562,10.413 C8.2 ; U3.5 31.566,8.597 31.562,8.601 C8.2
  Top Layer w0.5: v1(23.195,14.395) 23.195,14.314 23.42,14.089 C10.2
  Bottom Layer w0.15: R5.2 31.302,27.133 31.326,27.133 31.779,26.679 v1(34.58,26.679)
  Bottom Layer w0.3: R1.2 2.875,26.235 v1(3.265,26.625) ; v1(5.76,44.399) 6.419,44.399 6.661,44.641 6.716,44.641 7.3,45.225 C15.2 v1(8,43.875) ; v1(29.405,11.96) 30.056,11.308 30.056,10.191 ; v1(29.96,7.64) 29.96,9.212 30.056,9.308 v1(30.056,9.443) ; R3.2 30.482,9.765 ; v1(30.056,9.443) v1@30.056,9.579 ; v1(30.056,9.443) 30.16,9.443 30.482,9.765 ; v1@30.056,9.579 30.056,10.191 ; v1@30.056,9.579 30.269,9.791 30.269,9.978 ; 30.056,10.191 30.269,9.978 ; 30.269,9.978 30.482,9.765
  other v1: 19.955,23.085
VIN: C6.2 C9.2 PWR.2 R10.2 U3.1 U3.3 | length 37.1
  Top Layer w0.3: R10.2 31.54,3.585 v1@31.566,3.611 ; U3.3 34.393,5.322 34.835,4.88 v1(34.835,4.14)
  Top Layer w0.5: 31.566,4.467 31.566,4.299 ; U3.1 31.566,4.299 ; 32.03,0.96 31.987,1.003 C9.2 31.987,3.19 ; 31.566,4.299 31.987,3.878 31.987,3.19 ; 31.566,4.299 31.566,3.611 v1(31.612,3.565) 31.987,3.19
  Top Layer w0.8: 32.03,0.96 36.28,0.96 38.86,3.54 39.775,3.54 PWR.2
  Bottom Layer w0.3: C6.2 32.768,4.933 34.043,4.933 v1(34.835,4.14)
  Bottom Layer w0.5: C6.2 32.425,5.205 32.425,4.378 v1(31.612,3.565) 31.612,2.699 33.061,1.25 36.853,1.25 39.3,3.698 39.38,3.698 39.993,4.31 PWR.2
pads on no net: D1.26 U1.1 U1.4 U1.8 U1.15 U1.16 U1.17 U1.18 U1.19 U1.25 U1.26 U1.27 U1.28 U1.29 U1.32 U1.33 U1.34 U1.35 U1.36 U1.37 U1.38 U1.39 U1.40 U1.41 U1.42 U1.43 U1.44 U1.46 U1.47 U1.54 U1.55 U1.56 U1.57 U2.5 U3.4

## Polygon pours and split planes (outlines as drawn)
GND on Int1 (GND) (split plane): 44.49,0.51 0.51,0.51 0.51,55.49 44.49,55.49
VCC on Int2 (PWR) (split plane): 44.49,6.023 30.613,6.023 30.547,6.014 30.487,5.989 30.457,5.966 30.434,5.949 29.097,4.612 29.057,4.56 29.032,4.499 29.023,4.434 29.023,0.51 0.51,0.51 0.51,55.49 44.49,55.49
VIN on Int2 (PWR) (split plane): 44.49,0.51 29.528,0.51 29.528,4.329 30.717,5.518 44.49,5.518

## Other copper
Int2 (PWR) (plane layer: these items are gaps in the copper):
  lines w0.5: 29.276,0.071 44.992,0.071 44.992,5.771 44.875,5.771 30.613,5.771 29.276,4.434 29.276,0.071

## Silkscreen, mask and mechanical layers (free items; w line width, h text height)
Top Overlay:
  text "GND" at 42.117,11.113 h2 r270
  text "12V" at 42.125,5.5 h2 r270
Bottom Overlay:
  text "DST800 NMEA2k Indicator" at 39.125,47.625 h2
  text "Rev.A" at 39,45.5 h2
  text "CanH" at 35.895,19.28 h1.5
  text "CanL" at 35.967,14 h1.5
  text "GND" at 36.28,9.988 h1.5
  text "12V" at 36.25,1.625 h1.5
  text "BleuJack" at 16.95,0.96 h3
Assembly Bottom:
  circle w0.254: c23.5,44.5 r25.4

## Dimensions
0,0 to 0,56 on Drill Drawing
0,0 to 45,0 on Drill Drawing

## Text inside footprints (layer, text, board x,y; h text height)
D2: Bottom Overlay "A" at 32.958,10.487 h0.76 r270; Bottom Overlay "K" at 33.212,13.662 h0.51 r90